# Altium PCB PCB1.PcbDoc
Units mil, origin at the board's own origin, x right, y up, seen from the top; angles counter-clockwise.
Board outline 1475 x 1975 mil, 2 copper layers (Top Layer, Bottom Layer); 9 components, 19 nets, 63 pads, 2 vias.
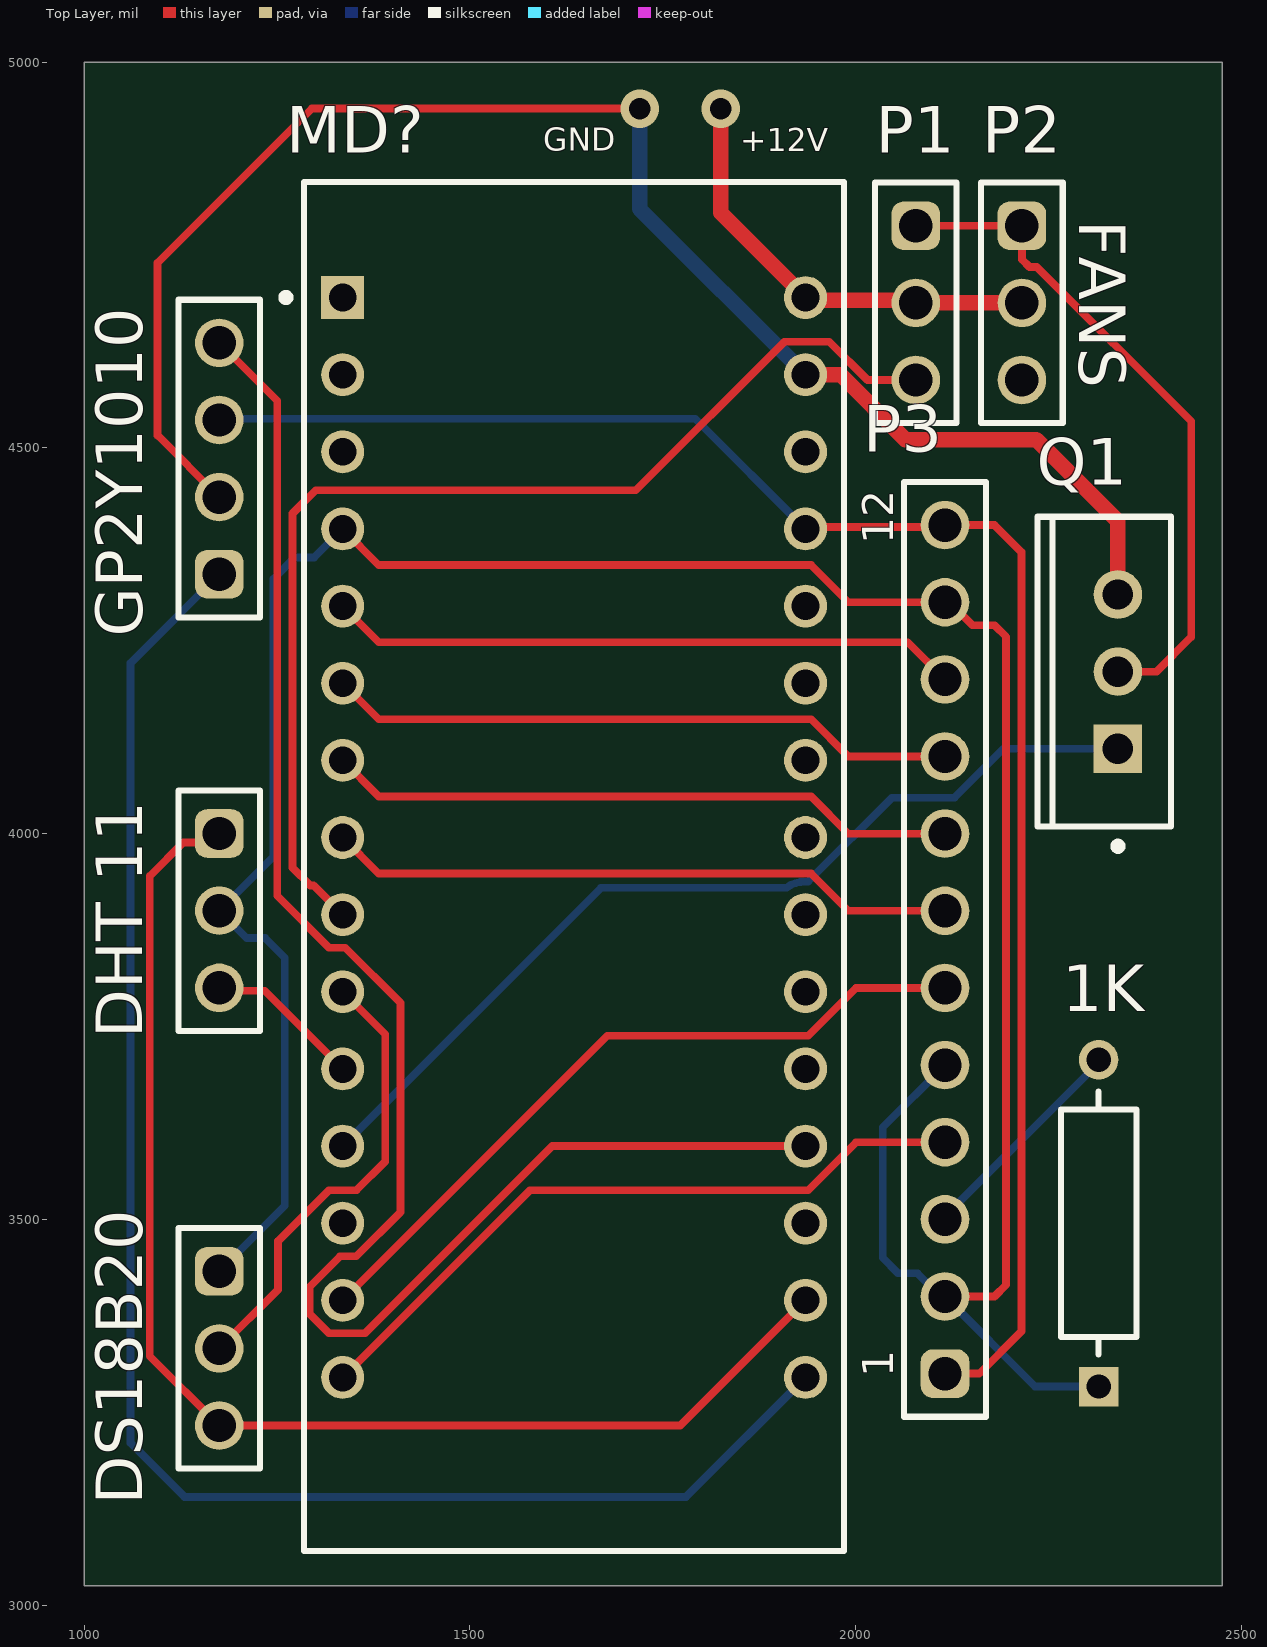
[diagram p0: Top Layer view]
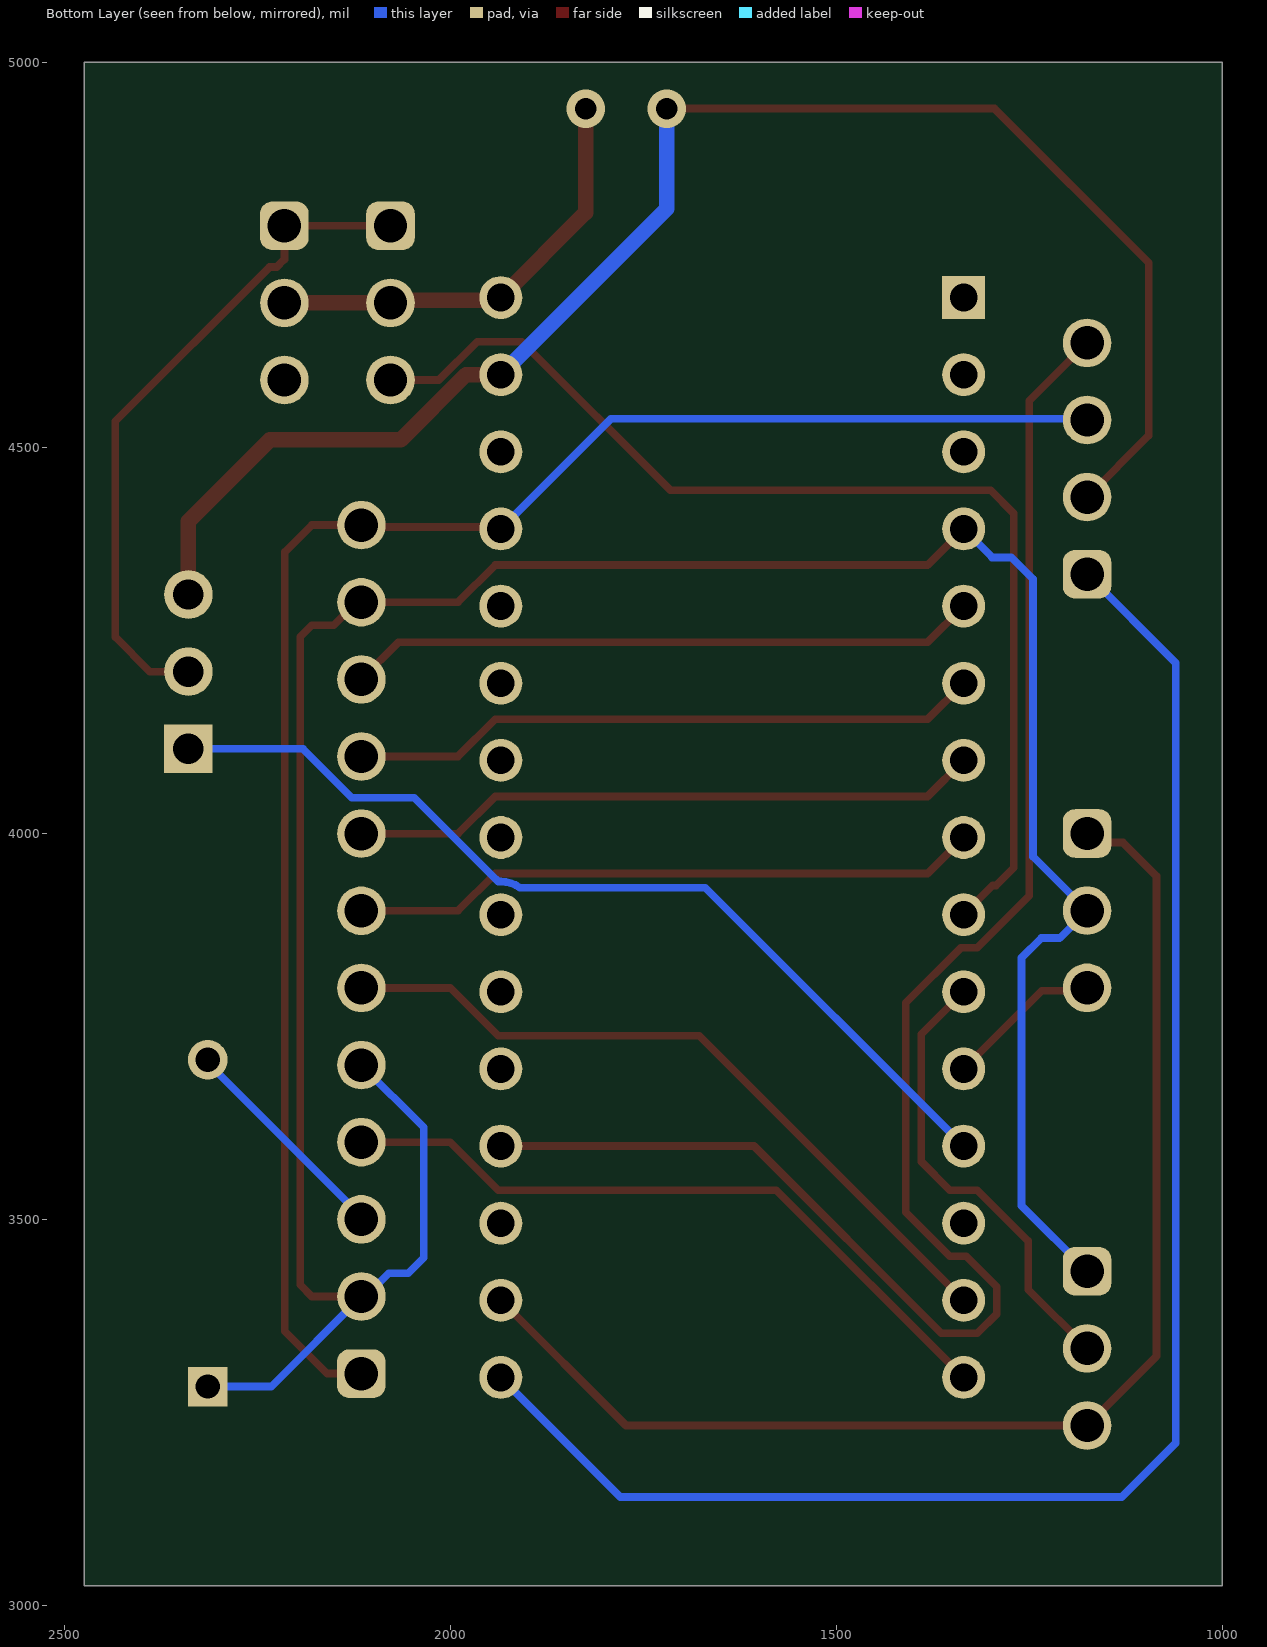
[diagram p1: Bottom Layer view, seen from below]
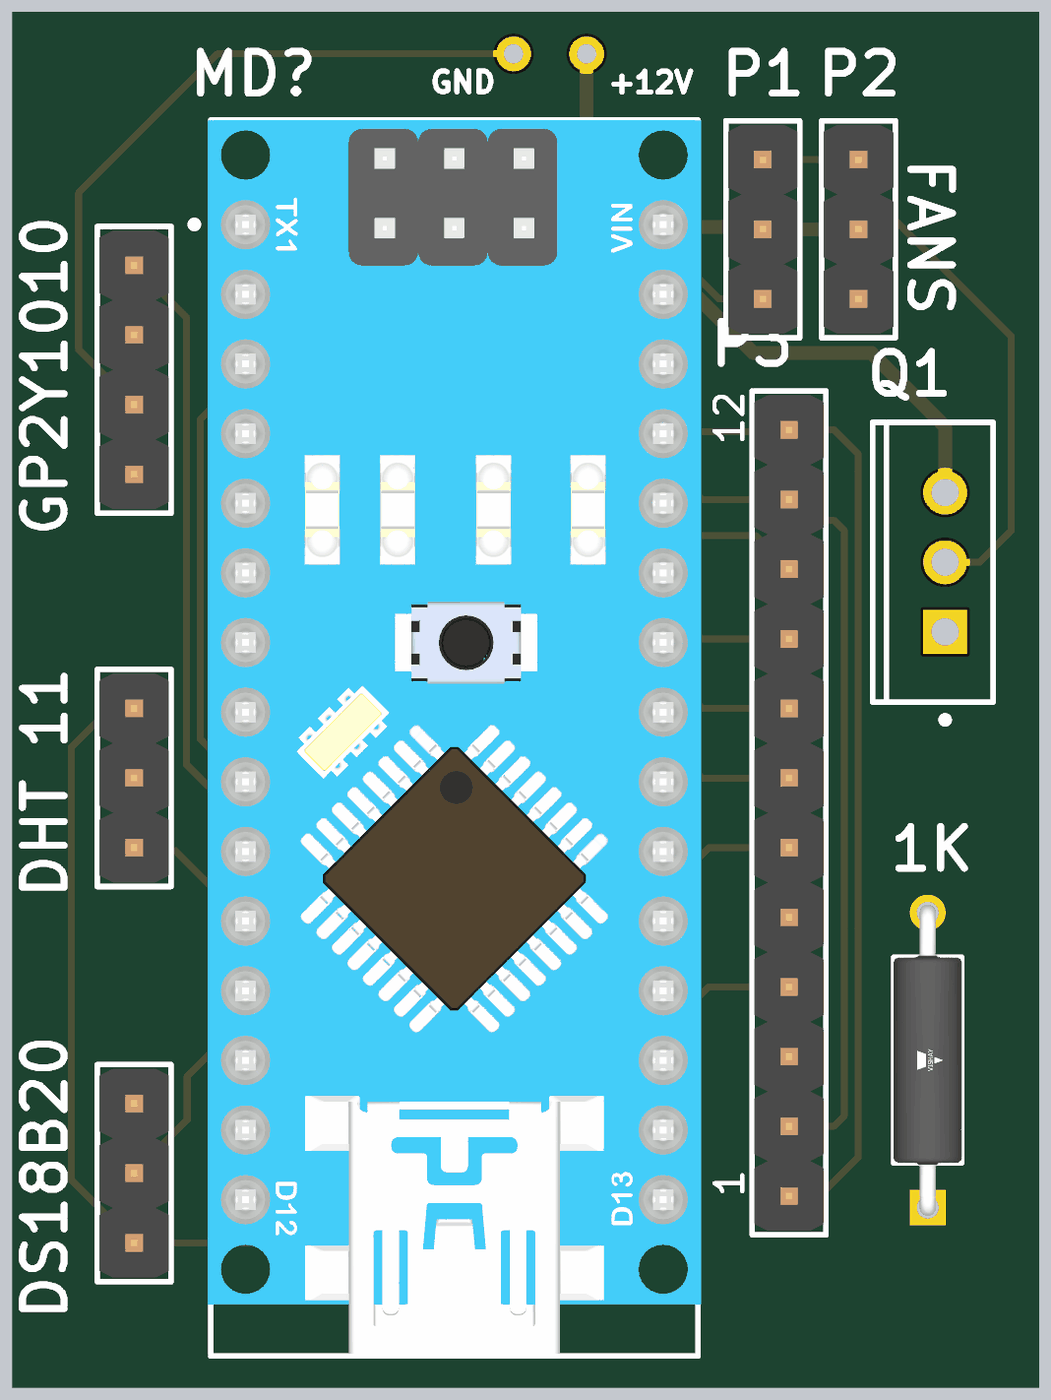
[diagram p2: 3D render of the assembled board from above, using the file's embedded part models]

## Layer stack, top to bottom
Top Solder: solder mask 0.4, Solder Resist, Dk 3.5
Top Layer: signal copper 1.4
Dielectric 1: dielectric 12.6, FR-4, Dk 4.8
Bottom Layer: signal copper 1.4
Bottom Solder: solder mask 0.4, Solder Resist, Dk 3.5

## Board outline
1000,3025 2475,3025 2475,5000 1000,5000

## Design rules (kind name [scope] priority, off if disabled: settings)
Clearance [All] p1: gap=10 ignorepadtopadclearanceinfootprint=FALSE except(0: Arc-Hole Track-Hole SMDPad-Hole THPad-Hole Via-Hole Fill-Hole Poly-Hole Region-Hole Text-Hole)
PolygonConnect [All] p1: connectstyle=Relief reliefconductorwidth=10 reliefentries=4 polygonreliefangle="90 Angle" airgapwidth=10
RoutingVias [All] p1: holewidth=28 width=50 viastyle="Through Hole" minholewidth=28 minwidth=50 maxholewidth=28 maxwidth=50
SolderMaskExpansion [All] p1: expansion=4 istentingtop=FALSE
Width [All] p1: maxlimit=10 minlimit=10 preferedwidth=10
30 further rules are at their usual default settings.

## Components (designator, comment, footprint, x,y, rotation, side; value= is the part's Value field where it differs from the comment)
1K "CCF5526K7FKE36" FP-CCF55-MFG 2315,3495 r90 top (schematic designator R?)
"DHT 11" "DHT 11" 61300311121 1175,3900.17 r270 top (schematic designator P5)
DS18B20 "DS18B20" 61300311121 1175,3332.68 r270 top (schematic designator P4)
GP2Y1010 "GP2Y" 61300411121 1175,4486.26 r90 top (schematic designator P6)
MD? "A000005" FP-A000005-MFG 1635,3957.5 r0 top
P1 "61300311121" 61300311121 2078.02,4688.11 r270 top
P2 "61300311121" 61300311121 2215.54,4688.11 r270 top
P3 "61301211121" 61301211121 2115.8,3850 r90 top
Q1 "IRFZ44N" INF-PG-TO220-3-1 2340,4210 r180 top

## Footprints (in the part's own frame and the unit in brackets; to place one, negate y for a bottom-side part, rotate by r counter-clockwise, add the part's x,y. Pads: shape width x height; smd on the part's side, far side on the other; paste and mask are expansions set on the pad)
61300311121 [mm] "Pin Header, pitch 2.54 mm, THT, Vertical, single row, 3p"
  rrect50% 1.6x1.6 hole 1.1: 1(-2.54,0)
  round 1.6 hole 1.1: 2(0,0) 3(2.54,0)
  silkscreen extent -3.96,-1.35 3.96,1.35, body extent -3.81,-1.27 3.81,1.27, height 8.57
61300411121 [mm] "Pin Header, pitch 2.54 mm, THT, Vertical, single row, 4p"
  rrect50% 1.6x1.6 hole 1.1: 1(-3.81,0)
  round 1.6 hole 1.1: 2(-1.27,0) 3(1.27,0) 4(3.81,0)
  silkscreen extent -5.23,-1.35 5.23,1.35, body extent -5.08,-1.27 5.08,1.27, height 8.57
61301211121 [mm] "Pin Header, pitch 2.54 mm, THT, Vertical, single row, 12p"
  rrect50% 1.6x1.6 hole 1.1: 1(-13.97,0)
  round 1.6 hole 1.1: 2(-11.43,0) 3(-8.89,0) 4(-6.35,0) 5(-3.81,0) 6(-1.27,0) 7(1.27,0) 8(3.81,0) 9(6.35,0) 10(8.89,0) 11(11.43,0) 12(13.97,0)
  silkscreen extent -15.39,-1.35 15.39,1.35, body extent -15.24,-1.27 15.24,1.27, height 8.57
FP-A000005-MFG [mil]
  rect 55.67x55.67 hole 35.98 paste-99999 mask+0: 1(-300,737.5)
  round 55.67 hole 35.98 paste-99999 mask+0: 2(-300,637.5) 3(-300,537.5) 4(-300,437.5) 5(-300,337.5) 6(-300,237.5) 7(-300,137.5) 8(-300,37.5) 9(-300,-62.5) 10(-300,-162.5) 11(-300,-262.5) 12(-300,-362.5) 13(-300,-462.5) 14(-300,-562.5) 15(-300,-662.5) 16(300,-662.5) 17(300,-562.5) 18(300,-462.5) 19(300,-362.5) 20(300,-262.5) 21(300,-162.5) 22(300,-62.5) 23(300,37.5) 24(300,137.5) 25(300,237.5) 26(300,337.5) 27(300,437.5) 28(300,537.5) 29(300,637.5) 30(300,737.5)
  silkscreen extent -379,-888 350,888, body extent -354,-891 354,891, height 10
FP-CCF55-MFG [mm]
  rect 1.3x1.3 hole 0.8 paste-2539.97 mask+0: 1(-5.38,0)
  round 1.3 hole 0.8 paste-2539.97 mask+0: 2(5.38,0)
  silkscreen extent -4.33,-1.24 4.33,1.24, body extent -6.13,-1.35 6.13,1.35, height 0.25
INF-PG-TO220-3-1 [mm] "FM, 3-Leads, Body 10x4.4mm, Pitch 2.54mm"
  rect 1.6x1.6 hole 1: 1(0,2.54)
  round 1.6 hole 1: 2(0,0) 3(0,-2.54)
  silkscreen extent -1.75,-5.1 2.65,5.87, body extent -1.75,-5.1 2.65,5.1, height 20.7

## Part data
1K: library part CMP-00030-42465748-1, "CCF5526K7FKE36 Res Metal Film 26.7K Ohm 1% 1/4W 1/2W ±100ppm/°C Conformal AXL Thru-Hole T/R", Case/Package=Conformal, Max Operating Temperature=165°C, Min Operating Temperature=-65°C, Power Rating=500mW, Resistance=26.7kΩ, Temperature Coefficient=100ppm/°C, Tolerance=1%, Voltage Rating=250V, Composition="Metal Film", Contact Plating=Tin, Diameter=2.29mm, Lead Diameter=640µm, Lead Free="Lead Free", Length=6.73mm, Military Standard=Not, Mount="Through Hole", NexarPartId=42465748, Radiation Hardening=No, RoHS=Compliant, Termination=Axial
"DHT 11" DS18B20 P1 P2: library part CMP-1502-01062-2, Color=Black, Contact Resistance=20mΩ, Current Rating=3A, Max Operating Temperature=105°C, Min Operating Temperature=-40°C, Operating Supply Voltage=250V, Connector Type="Male Pin", Contact Material=Copper, Contact Mating Length=5.9944mm, Contact Plating=Gold, Gender=Male, Height=8.94mm, Lead Free="Lead Free", Lead Pitch=2.54mm, Mount="Through Hole", NexarPartId=32855521, Number of Contacts=3, Number of Pins=3, Number of Positions=3, Number of Rows=1, Orientation=Vertical, Packaging=Bulk, Pitch=2.54mm, REACH SVHC=Unknown, RoHS=Compliant, Termination=Solder, Voltage Rating=250V
GP2Y1010: library part CMP-1502-01064-2, Color=Black, Contact Resistance=20mΩ, Current Rating=3A, Max Operating Temperature=105°C, Min Operating Temperature=-40°C, Operating Supply Voltage=250V, Connector Type="Male Pin", Contact Material=Copper, Contact Mating Length=5.9944mm, Contact Plating=Gold, Gender=Male, Height=8.89mm, Lead Free="Lead Free", Lead Pitch=2.54mm, Mount="Through Hole", NexarPartId=32855522, Number of Contacts=4, Number of Pins=4, Number of Positions=4, Number of Rows=1, Orientation=Vertical, Packaging=Bulk, Pitch=2.54mm, REACH SVHC=Unknown, RoHS=Compliant, Termination=Solder, Voltage Rating=250V
MD?: library part CMP-189986-000002-1, "ARDUINO NANO ATMEGA328 EVAL BRD", Operating Supply Voltage=12V, Package Quantity=50, Core Architecture=AVR, Data Bus Width=8b, Evaluation Kit=Yes, Height=0.25inch, Interface=I2C, Length=7inch, Number of Bits=8, Packaging=Bulk, REACH SVHC="No SVHC", Series="AVR® ATmega", Weight=0.358383oz, Width=5inch
P3: library part CMP-1502-01086-2, Color=Black, Contact Resistance=20mΩ, Current Rating=3A, Operating Supply Voltage=250V, Connector Type="Male Pin", Contact Material=Copper, Contact Mating Length=5.9944mm, Contact Plating=Gold, Gender=Male, Lead Pitch=2.54mm, Mount="Through Hole", NexarPartId=32855538, Number of Contacts=12, Number of Pins=12, Number of Positions=12, Number of Rows=1, Orientation=Vertical, Packaging=Bulk, Pitch=2.54mm, REACH SVHC=Unknown, RoHS=Compliant, Termination=Solder
Q1: library part CMP-1164-00044-1, "N-Channel CoolMOS Power-Transistor, 600 V VDS, 4.5 A ID, -55 to 150 degC, PG-TO220-3-1, Tube, Green", Manufacturer=Infineon, PartNumber=SPP04N60C3, ComponentLink1Description="Manufacturer URL", ComponentLink1URL=http://www.infineon.com/, ComponentLink2Description=Datasheet, ComponentLink2URL=http://www.infineon.com/dgdl/SPP_A04N60C3_Rev.3.1.pdf?folderId=db3a304412b407950112b408e8c90004&fileId=db3a304412b407950112b42dd6a14900, ComponentLink3Description="Package Specification", ComponentLink3URL=http://www.infineon.com/dgdl/BTS117_DS_14.pdf?folderId=db3a30431400ef68011421b54e2e0564&fileId=db3a30433a747525013abff8302d549c&location=en.Products.Automotive_ICs.Smart_High-_and_Low-Side_Switches.HITFET___TEMPFET__-_Smart_Low-Side_Switches.DATASHEET.BTS1, DatasheetVersion="Rev. 3.1", Green=TRUE, ID (max)="4.5Â A", IDpuls (max)="13.5Â A", Mounting Technology="Through Hole", PackageDescription="3-Pin Plastic (Green) Transistor Single Outline Package, 10 x 9.25 mm Body, 2.54 mm Pitch", PackageReference=PG-TO220-3-1, PackageVersion=Jul-12, Packing=Tube, Polarity=N, Ptot (max)="50Â W", QG="19Â nC", RDS (on) (max)="950Â mOhm", Rth="2.5Â K/W", RthJA (max)="62Â K/W", RthJC (max)="2.5Â K/W", Technology="CoolMOS C3", VDS (max)="600Â V", VGS(th) (max)="3.9Â V", VGS(th) (min)="2.1Â V"

## Via types
v1: diameter 50, hole 28, Top Layer to Bottom Layer, 2 vias

## Nets (pads, with @x,y where several pads share a name; then routed paths per layer and width w, separated by ;. In a path a pad name is that pad's centre, name@x,y a point inside that pad or via, vN(x,y) a via of type N, cw(c..) or ccw(c..) an arc to the next point about the centre after c; other vN are vias at no path point)
GND: GP2Y1010.2 MD?.29 Q1.3 | length 2057.5
  Top Layer w10: GP2Y1010.2 1095,4516.26 1095,4740 1295,4940 v1(1720,4940)
  Top Layer w20: MD?.29 1980.16,4595 2064.53,4510.63 2234.37,4510.63 2340,4405 Q1.3
  Bottom Layer w20: v1(1720,4940) 1720,4810 MD?.29
NetMD?_4: 1K.1 "DHT 11.2" DS18B20.1 MD?.4 P3.2 P3.5 P3.11 | length 3603.7
  Top Layer w10: MD?.4 1381.8,4348.2 1942.38,4348.2 1990.58,4300 P3.11 2121.56,4300 2151.56,4270 2180,4270 2195,4255 2195,3415 2180,3400 P3.2
  Bottom Layer w10: DS18B20.1 1260,3517.68 1260,3839.14 1234.56,3864.58 1210.58,3864.58 1175,3900.17 1245,3970.17 1245,4330 1273.13,4358.13 1298.13,4358.13 MD?.4 ; P3.5 2035,3619.2 2035,3450 2054.93,3430.07 2080.11,3430.07 2110.18,3400 P3.2 2232.61,3283.19 1K.1
NetMD?_5: MD?.5 P3.10 | length 820.2
  Top Layer w10: MD?.5 1381.8,4248.2 2067.6,4248.2 P3.10
NetMD?_6: MD?.6 P3.9 | length 820.2
  Top Layer w10: MD?.6 1381.8,4148.2 1942.38,4148.2 1990.58,4100 P3.9
NetMD?_7: MD?.7 P3.8 | length 820.2
  Top Layer w10: MD?.7 1381.8,4048.2 1942.38,4048.2 1990.58,4000 P3.8
NetMD?_8: MD?.8 P3.7 | length 820.2
  Top Layer w10: MD?.8 1381.8,3948.2 1942.38,3948.2 1990.58,3900 P3.7
NetMD?_9: MD?.9 P1.3 | length 1470.3
  Top Layer w10: MD?.9 1297.11,3932.89 1292.97,3932.89 1270,3955.86 1270,4415 1300,4445 1715,4445 1907.83,4637.83 1965.61,4637.83 2015.33,4588.11 P1.3
NetMD?_10: DS18B20.2 MD?.10 | length 595
  Top Layer w10: DS18B20.2 1251.2,3408.88 1251.2,3471.78 1317.26,3537.83 1352.83,3537.83 1390,3575 1390,3740 MD?.10
NetMD?_11: "DHT 11.3" MD?.11 | length 203.6
  Top Layer w10: 1175,3800.17 1179.02,3796.15 1233.85,3796.15 MD?.11
NetMD?_12: MD?.12 Q1.1 | length 1216.7
  Bottom Layer w10: MD?.12 1670,3930 1910.31,3930 cw(c1935,3895) 1935,3937.83 1938.41,3937.83 1941.34,3940.76 2047.07,4046.5 2128.05,4046.5 2191.56,4110 Q1.1
NetMD?_14: MD?.14 P3.6 | length 948.6
  Top Layer w10: MD?.14 1677.83,3737.83 1938.41,3737.83 2000.58,3800 P3.6
NetMD?_15: MD?.15 P3.4 | length 907.1
  Top Layer w10: MD?.15 1577.83,3537.83 1938.41,3537.83 2000.58,3600 P3.4
NetMD?_16: GP2Y1010.1 MD?.16 | length 2142.1
  Bottom Layer w10: GP2Y1010.1 1060,4221.26 1060,3210 1130,3140 1780,3140 MD?.16
NetMD?_17: "DHT 11.1" DS18B20.3 MD?.17 | length 1689.7
  Top Layer w10: 1175,4000.17 1163.34,3988.5 1128.5,3988.5 1085,3945 1085,3322.68 DS18B20.3 1772.68,3232.68 MD?.17
NetMD?_19: GP2Y1010.4 MD?.19 | length 2183.7
  Top Layer w10: GP2Y1010.4 1250,4561.26 1250,3919.42 1317.26,3852.17 1338.41,3852.17 1410,3780.58 1410,3509.42 1352.74,3452.17 1331.59,3452.17 1292.17,3412.74 1292.17,3377.26 1317.26,3352.17 1363.88,3352.17 1606.72,3595 MD?.19
NetMD?_27: GP2Y1010.3 MD?.27 P3.1 P3.12 | length 2248.4
  Top Layer w10: MD?.27 1937.5,4397.5 2113.3,4397.5 P3.12 2180,4400 2215,4365 2215,3355 2160,3300 P3.1
  Bottom Layer w10: GP2Y1010.3 1176.58,4537.83 1792.17,4537.83 MD?.27
NetMD?_30: MD?.30 P1.2 P2.2 | length 574
  Top Layer w10: MD?.30 MD?.30@1938.44,4691.56 ; P1.2@2074.58,4691.56 P1.2
  Top Layer w20: v1(1825,4940) 1825,4805 MD?.30 ; MD?.30@1938.44,4691.56 P1.2@2074.58,4691.56 ; P1.2 P2.2
NetP1_1: P1.1 P2.1 Q1.2 | length 880.7
  Top Layer w10: P1.1 P2.1 2215.54,4744.46 2225.39,4734.61 2234.8,4734.61 2435,4534.41 2435,4255 2390,4210 Q1.2
NetP3_3: 1K.2 P3.3 | length 289.3
  Bottom Layer w10: P3.3 2115.8,3503.81 2315,3703.01 1K.2
pads on no net: MD?.1 MD?.2 MD?.3 MD?.13 MD?.18 MD?.20 MD?.21 MD?.22 MD?.23 MD?.24 MD?.25 MD?.26 MD?.28 P2.3

## Silkscreen, mask and mechanical layers (free items; w line width, h text height)
Top Overlay:
  text "GND" at 1595,4885 h30
  text "+12V" at 1850.56,4884.6 h30
  text "FANS" at 2290,4795 h60 r270

## Text inside footprints (layer, text, board x,y; h text height)
P3: Top Overlay "12" at 2048.87,4375.2 h40 r90; Top Overlay "1" at 2048.87,3295.28 h40 r90